# EAGLE board analog_sensor_x8 (EAGLE 7.5.0)
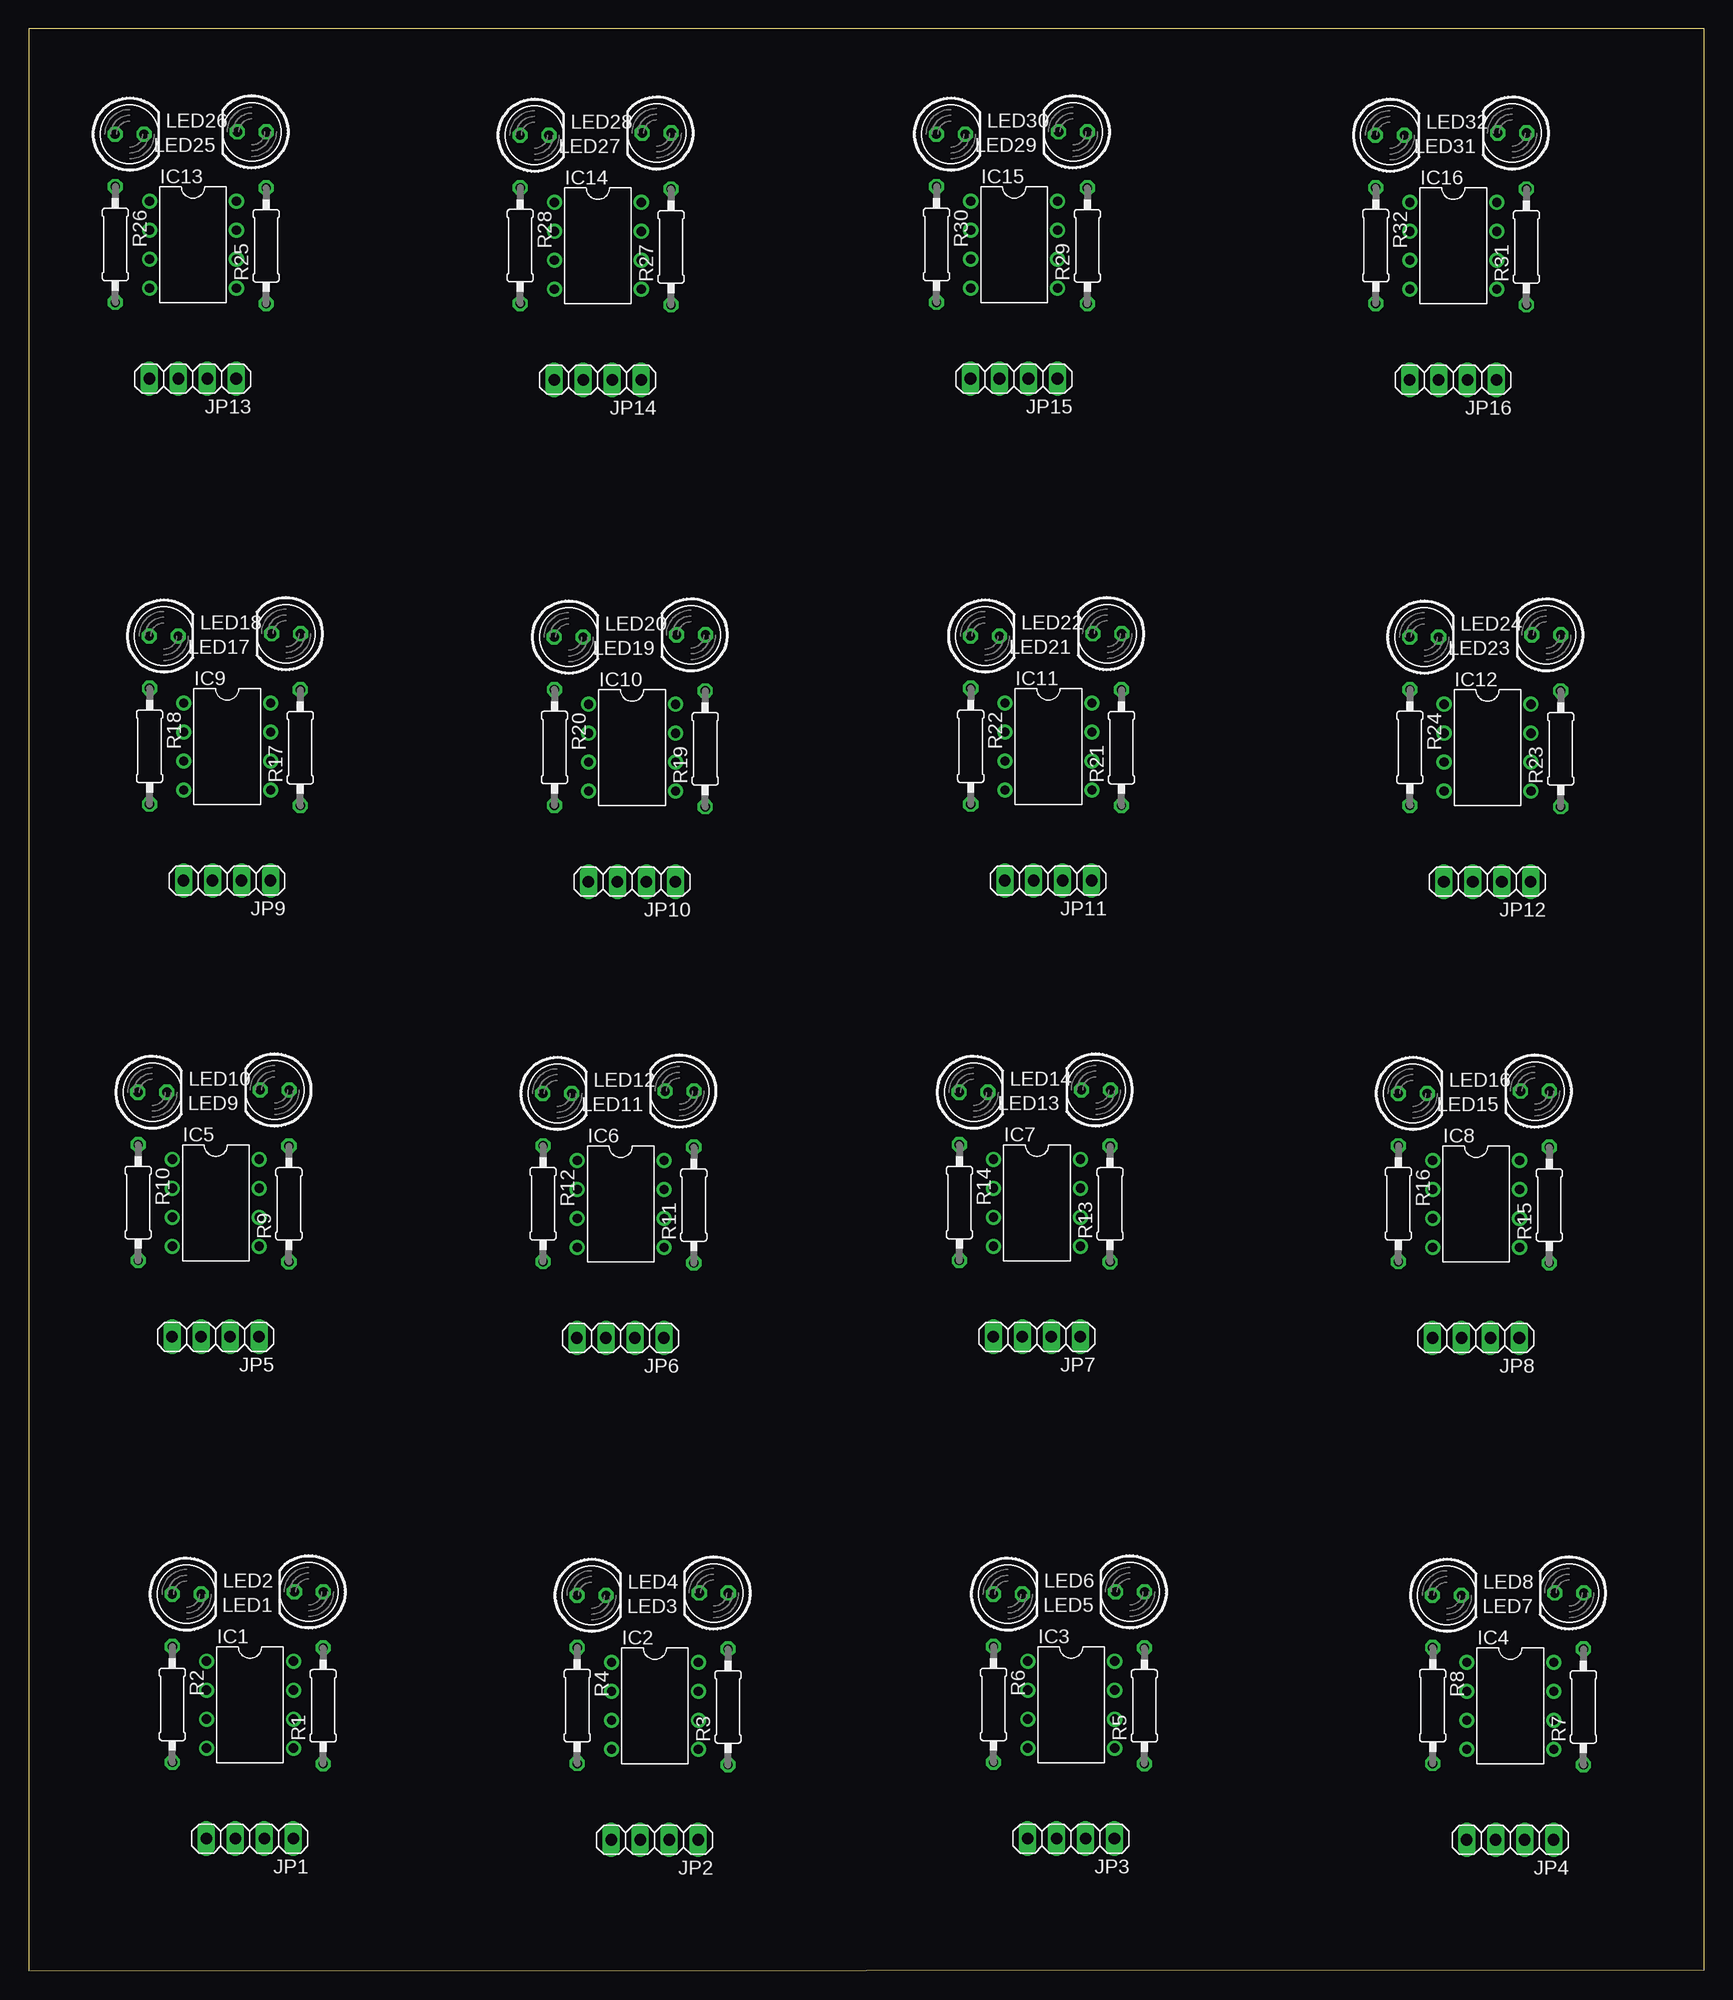
[diagram p0: board, top side]
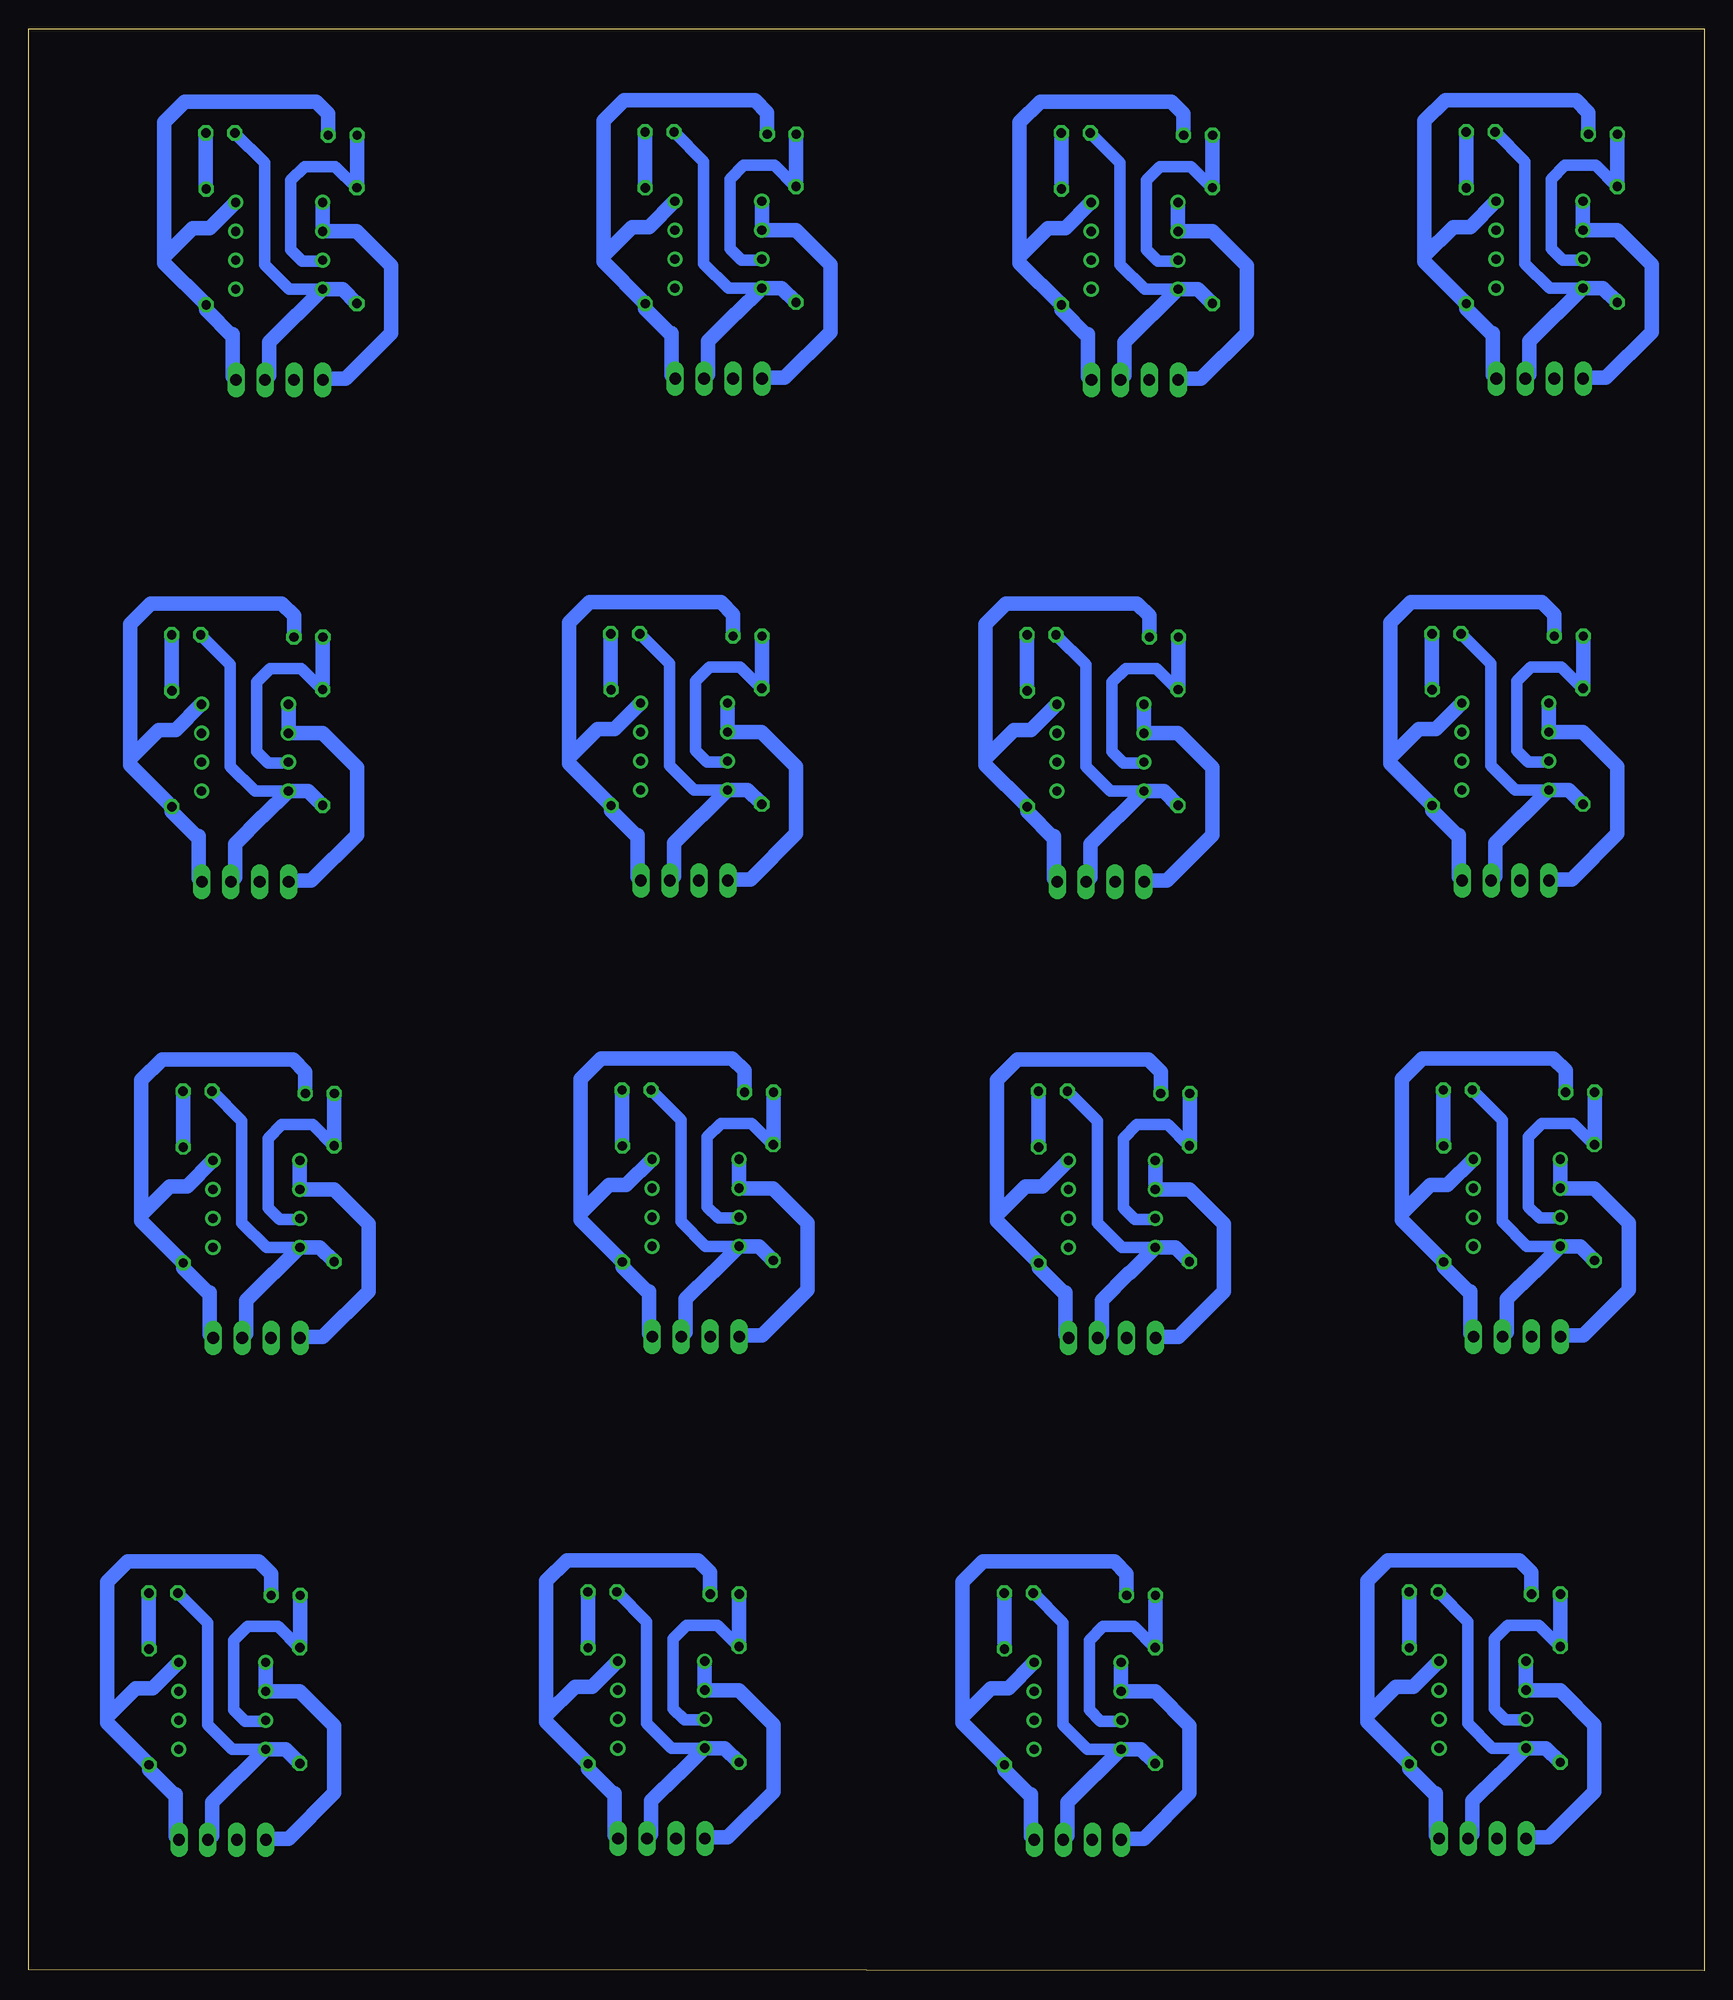
[diagram p1: board, bottom side, seen from below]

Size 146.9 x 170.3 mm. Coordinates in mm from the lower left corner, seen from the top.
Outline: 0,0 146.9,0.1 146.9,170.3 0,170.3 0,0
Copper layers (1*16): Top 0.035mm / dielectric 1.5mm / Bottom 0.035mm
Design rules "default": minimum track width 10mil, minimum drill 24mil, track to track 8mil, track to pad 8mil, pad to pad 8mil, via to via 8mil, smd to smd 8mil, copper to edge 40mil, drill to drill 8mil, minimum pad ring 10mil, minimum via ring 8mil, stop-mask expansion 4mil, vias tented up to drill 0mil, thermal gap 10mil

## Footprints (pad centres in the part's own frame; a part is rotated, then mirrored left to right if it is on the bottom)
DIL08 = drill 0.813 pad 1.27: 1 -3.81,-3.81; 2 -1.27,-3.81; 3 1.27,-3.81; 4 3.81,-3.81; 5 3.81,3.81; 6 1.27,3.81; 7 -1.27,3.81; 8 -3.81,3.81
1X04 = drill 1.016 long: 1 -3.81,0; 2 -1.27,0; 3 1.27,0; 4 3.81,0
LED5MM = drill 0.813 octagon: A -1.27,0; K 1.27,0
0207/10 = drill 0.813 octagon: 1 -5.08,0; 2 5.08,0

## Placement (x,y rotation side)
IC1  LM358N  [DIL08]  19.42,23.35 270 top
IC2  LM358N  [DIL08]  54.92,23.25 270 top
IC3  LM358N  [DIL08]  91.42,23.35 270 top
IC4  LM358N  [DIL08]  129.92,23.25 270 top
IC5  LM358N  [DIL08]  16.42,67.35 270 top
IC6  LM358N  [DIL08]  51.92,67.25 270 top
IC7  LM358N  [DIL08]  88.42,67.35 270 top
IC8  LM358N  [DIL08]  126.92,67.25 270 top
IC9  LM358N  [DIL08]  17.42,107.35 270 top
IC10  LM358N  [DIL08]  52.92,107.25 270 top
IC11  LM358N  [DIL08]  89.42,107.35 270 top
IC12  LM358N  [DIL08]  127.92,107.25 270 top
IC13  LM358N  [DIL08]  14.42,151.35 270 top
IC14  LM358N  [DIL08]  49.92,151.25 270 top
IC15  LM358N  [DIL08]  86.42,151.35 270 top
IC16  LM358N  [DIL08]  124.92,151.25 270 top
JP1  [1X04]  19.4,11.6 180 top
JP2  [1X04]  54.9,11.5 180 top
JP3  [1X04]  91.4,11.6 180 top
JP4  [1X04]  129.9,11.5 180 top
JP5  [1X04]  16.4,55.6 180 top
JP6  [1X04]  51.9,55.5 180 top
JP7  [1X04]  88.4,55.6 180 top
JP8  [1X04]  126.9,55.5 180 top
JP9  [1X04]  17.4,95.6 180 top
JP10  [1X04]  52.9,95.5 180 top
JP11  [1X04]  89.4,95.6 180 top
JP12  [1X04]  127.9,95.5 180 top
JP13  [1X04]  14.4,139.6 180 top
JP14  [1X04]  49.9,139.5 180 top
JP15  [1X04]  86.4,139.6 180 top
JP16  [1X04]  124.9,139.5 180 top
LED1  [LED5MM]  24.58,33.24 180 top
LED2  [LED5MM]  13.86,33.04 0 top
LED3  [LED5MM]  60.08,33.14 180 top
LED4  [LED5MM]  49.36,32.94 0 top
LED5  [LED5MM]  96.58,33.24 180 top
LED6  [LED5MM]  85.86,33.04 0 top
LED7  [LED5MM]  135.08,33.14 180 top
LED8  [LED5MM]  124.36,32.94 0 top
LED9  [LED5MM]  21.58,77.24 180 top
LED10  [LED5MM]  10.86,77.04 0 top
LED11  [LED5MM]  57.08,77.14 180 top
LED12  [LED5MM]  46.36,76.94 0 top
LED13  [LED5MM]  93.58,77.24 180 top
LED14  [LED5MM]  82.86,77.04 0 top
LED15  [LED5MM]  132.08,77.14 180 top
LED16  [LED5MM]  121.36,76.94 0 top
LED17  [LED5MM]  22.58,117.24 180 top
LED18  [LED5MM]  11.86,117.04 0 top
LED19  [LED5MM]  58.08,117.14 180 top
LED20  [LED5MM]  47.36,116.94 0 top
LED21  [LED5MM]  94.58,117.24 180 top
LED22  [LED5MM]  83.86,117.04 0 top
LED23  [LED5MM]  133.08,117.14 180 top
LED24  [LED5MM]  122.36,116.94 0 top
LED25  [LED5MM]  19.58,161.24 180 top
LED26  [LED5MM]  8.86,161.04 0 top
LED27  [LED5MM]  55.08,161.14 180 top
LED28  [LED5MM]  44.36,160.94 0 top
LED29  [LED5MM]  91.58,161.24 180 top
LED30  [LED5MM]  80.86,161.04 0 top
LED31  [LED5MM]  130.08,161.14 180 top
LED32  [LED5MM]  119.36,160.94 0 top
R1  [0207/10]  25.83,23.25 90 top
R2  [0207/10]  12.61,23.37 270 top
R3  [0207/10]  61.33,23.15 90 top
R4  [0207/10]  48.11,23.27 270 top
R5  [0207/10]  97.83,23.25 90 top
R6  [0207/10]  84.61,23.37 270 top
R7  [0207/10]  136.33,23.15 90 top
R8  [0207/10]  123.11,23.27 270 top
R9  [0207/10]  22.83,67.25 90 top
R10  [0207/10]  9.61,67.37 270 top
R11  [0207/10]  58.33,67.15 90 top
R12  [0207/10]  45.11,67.27 270 top
R13  [0207/10]  94.83,67.25 90 top
R14  [0207/10]  81.61,67.37 270 top
R15  [0207/10]  133.33,67.15 90 top
R16  [0207/10]  120.11,67.27 270 top
R17  [0207/10]  23.83,107.25 90 top
R18  [0207/10]  10.61,107.37 270 top
R19  [0207/10]  59.33,107.15 90 top
R20  [0207/10]  46.11,107.27 270 top
R21  [0207/10]  95.83,107.25 90 top
R22  [0207/10]  82.61,107.37 270 top
R23  [0207/10]  134.33,107.15 90 top
R24  [0207/10]  121.11,107.27 270 top
R25  [0207/10]  20.83,151.25 90 top
R26  [0207/10]  7.61,151.37 270 top
R27  [0207/10]  56.33,151.15 90 top
R28  [0207/10]  43.11,151.27 270 top
R29  [0207/10]  92.83,151.25 90 top
R30  [0207/10]  79.61,151.37 270 top
R31  [0207/10]  131.33,151.15 90 top
R32  [0207/10]  118.11,151.27 270 top

## Library data of the parts
IC1-IC16 = linear
JP1-JP16 = pinhead
LED1-LED32 = led
R1-R32 = resistor

## Nets
GND: IC1.4 JP1.2 LED1.K R2.2
GND1: IC2.4 JP2.2 LED3.K R4.2
GND2: IC3.4 JP3.2 LED5.K R6.2
GND3: IC4.4 JP4.2 LED7.K R8.2
GND4: IC5.4 JP5.2 LED9.K R10.2
GND5: IC6.4 JP6.2 LED11.K R12.2
GND6: IC7.4 JP7.2 LED13.K R14.2
GND7: IC8.4 JP8.2 LED15.K R16.2
GND8: IC9.4 JP9.2 LED17.K R18.2
GND9: IC10.4 JP10.2 LED19.K R20.2
GND10: IC11.4 JP11.2 LED21.K R22.2
GND11: IC12.4 JP12.2 LED23.K R24.2
GND12: IC13.4 JP13.2 LED25.K R26.2
GND13: IC14.4 JP14.2 LED27.K R28.2
GND14: IC15.4 JP15.2 LED29.K R30.2
GND15: IC16.4 JP16.2 LED31.K R32.2
N$1: IC1.3 LED2.A R2.1
N$2: IC2.3 LED4.A R4.1
N$3: LED1.A R1.2
N$4: LED3.A R3.2
N$5: JP1.3
N$6: JP2.3
N$7: IC3.3 LED6.A R6.1
N$8: LED5.A R5.2
N$9: JP3.3
N$10: IC4.3 LED8.A R8.1
N$11: LED7.A R7.2
N$12: JP4.3
N$13: IC5.3 LED10.A R10.1
N$14: LED9.A R9.2
N$15: JP5.3
N$16: IC6.3 LED12.A R12.1
N$17: LED11.A R11.2
N$18: JP6.3
N$19: IC7.3 LED14.A R14.1
N$20: LED13.A R13.2
N$21: JP7.3
N$22: IC8.3 LED16.A R16.1
N$23: LED15.A R15.2
N$24: JP8.3
N$25: IC9.3 LED18.A R18.1
N$26: LED17.A R17.2
N$27: JP9.3
N$28: IC10.3 LED20.A R20.1
N$29: LED19.A R19.2
N$30: JP10.3
N$31: IC11.3 LED22.A R22.1
N$32: LED21.A R21.2
N$33: JP11.3
N$34: IC12.3 LED24.A R24.1
N$35: LED23.A R23.2
N$36: JP12.3
N$37: IC13.3 LED26.A R26.1
N$38: LED25.A R25.2
N$39: JP13.3
N$40: IC14.3 LED28.A R28.1
N$41: LED27.A R27.2
N$42: JP14.3
N$43: IC15.3 LED30.A R30.1
N$44: LED29.A R29.2
N$45: JP15.3
N$46: IC16.3 LED32.A R32.1
N$47: LED31.A R31.2
N$48: JP16.3
SIGNAL: IC1.1 IC1.2 JP1.4
SIGNAL1: IC2.1 IC2.2 JP2.4
SIGNAL2: IC3.1 IC3.2 JP3.4
SIGNAL3: IC4.1 IC4.2 JP4.4
SIGNAL4: IC5.1 IC5.2 JP5.4
SIGNAL5: IC6.1 IC6.2 JP6.4
SIGNAL6: IC7.1 IC7.2 JP7.4
SIGNAL7: IC8.1 IC8.2 JP8.4
SIGNAL8: IC9.1 IC9.2 JP9.4
SIGNAL9: IC10.1 IC10.2 JP10.4
SIGNAL10: IC11.1 IC11.2 JP11.4
SIGNAL11: IC12.1 IC12.2 JP12.4
SIGNAL12: IC13.1 IC13.2 JP13.4
SIGNAL13: IC14.1 IC14.2 JP14.4
SIGNAL14: IC15.1 IC15.2 JP15.4
SIGNAL15: IC16.1 IC16.2 JP16.4
VCC: IC1.8 JP1.1 LED2.K R1.1
VCC1: IC2.8 JP2.1 LED4.K R3.1
VCC2: IC3.8 JP3.1 LED6.K R5.1
VCC3: IC4.8 JP4.1 LED8.K R7.1
VCC4: IC5.8 JP5.1 LED10.K R9.1
VCC5: IC6.8 JP6.1 LED12.K R11.1
VCC6: IC7.8 JP7.1 LED14.K R13.1
VCC7: IC8.8 JP8.1 LED16.K R15.1
VCC8: IC9.8 JP9.1 LED18.K R17.1
VCC9: IC10.8 JP10.1 LED20.K R19.1
VCC10: IC11.8 JP11.1 LED22.K R21.1
VCC11: IC12.8 JP12.1 LED24.K R23.1
VCC12: IC13.8 JP13.1 LED26.K R25.1
VCC13: IC14.8 JP14.1 LED28.K R27.1
VCC14: IC15.8 JP15.1 LED30.K R29.1
VCC15: IC16.8 JP16.1 LED32.K R31.1

## Tracks (layer width: path | path; a pad name or v marks a point on that pad's centre or on a via)
GND
  Bottom 1.016: IC1.4 18.54,19.54 20.7,21.7 20.7,30.63 LED1.K
  Bottom 1.27: R2.2 13.86,19.54 IC1.4 17.85,17.3 17.9,17.3 20.3,14.9 20.3,11.97 JP1.2
GND1
  Bottom 1.016: IC2.4 54.04,19.44 56.2,21.6 56.2,30.53 LED3.K
  Bottom 1.27: R4.2 49.36,19.44 IC2.4 53.35,17.2 53.4,17.2 55.8,14.8 55.8,11.87 JP2.2
GND2
  Bottom 1.016: IC3.4 90.54,19.54 92.7,21.7 92.7,30.63 LED5.K
  Bottom 1.27: R6.2 85.86,19.54 IC3.4 89.85,17.3 89.9,17.3 92.3,14.9 92.3,11.97 JP3.2
GND3
  Bottom 1.016: IC4.4 129.04,19.44 131.2,21.6 131.2,30.53 LED7.K
  Bottom 1.27: R8.2 124.36,19.44 IC4.4 128.35,17.2 128.4,17.2 130.8,14.8 130.8,11.87 JP4.2
GND4
  Bottom 1.016: IC5.4 15.54,63.54 17.7,65.7 17.7,74.63 LED9.K
  Bottom 1.27: R10.2 10.86,63.54 IC5.4 14.85,61.3 14.9,61.3 17.3,58.9 17.3,55.97 JP5.2
GND5
  Bottom 1.016: IC6.4 51.04,63.44 53.2,65.6 53.2,74.53 LED11.K
  Bottom 1.27: R12.2 46.36,63.44 IC6.4 50.35,61.2 50.4,61.2 52.8,58.8 52.8,55.87 JP6.2
GND6
  Bottom 1.016: IC7.4 87.54,63.54 89.7,65.7 89.7,74.63 LED13.K
  Bottom 1.27: R14.2 82.86,63.54 IC7.4 86.85,61.3 86.9,61.3 89.3,58.9 89.3,55.97 JP7.2
GND7
  Bottom 1.016: IC8.4 126.04,63.44 128.2,65.6 128.2,74.53 LED15.K
  Bottom 1.27: R16.2 121.36,63.44 IC8.4 125.35,61.2 125.4,61.2 127.8,58.8 127.8,55.87 JP8.2
GND8
  Bottom 1.016: IC9.4 16.54,103.54 18.7,105.7 18.7,114.63 LED17.K
  Bottom 1.27: R18.2 11.86,103.54 IC9.4 15.85,101.3 15.9,101.3 18.3,98.9 18.3,95.97 JP9.2
GND9
  Bottom 1.016: IC10.4 52.04,103.44 54.2,105.6 54.2,114.53 LED19.K
  Bottom 1.27: R20.2 47.36,103.44 IC10.4 51.35,101.2 51.4,101.2 53.8,98.8 53.8,95.87 JP10.2
GND10
  Bottom 1.016: IC11.4 88.54,103.54 90.7,105.7 90.7,114.63 LED21.K
  Bottom 1.27: R22.2 83.86,103.54 IC11.4 87.85,101.3 87.9,101.3 90.3,98.9 90.3,95.97 JP11.2
GND11
  Bottom 1.016: IC12.4 127.04,103.44 129.2,105.6 129.2,114.53 LED23.K
  Bottom 1.27: R24.2 122.36,103.44 IC12.4 126.35,101.2 126.4,101.2 128.8,98.8 128.8,95.87 JP12.2
GND12
  Bottom 1.016: IC13.4 13.54,147.54 15.7,149.7 15.7,158.63 LED25.K
  Bottom 1.27: R26.2 8.86,147.54 IC13.4 12.85,145.3 12.9,145.3 15.3,142.9 15.3,139.97 JP13.2
GND13
  Bottom 1.016: IC14.4 49.04,147.44 51.2,149.6 51.2,158.53 LED27.K
  Bottom 1.27: R28.2 44.36,147.44 IC14.4 48.35,145.2 48.4,145.2 50.8,142.8 50.8,139.87 JP14.2
GND14
  Bottom 1.016: IC15.4 85.54,147.54 87.7,149.7 87.7,158.63 LED29.K
  Bottom 1.27: R30.2 80.86,147.54 IC15.4 84.85,145.3 84.9,145.3 87.3,142.9 87.3,139.97 JP15.2
GND15
  Bottom 1.016: IC16.4 124.04,147.44 126.2,149.6 126.2,158.53 LED31.K
  Bottom 1.27: R32.2 119.36,147.44 IC16.4 123.35,145.2 123.4,145.2 125.8,142.8 125.8,139.87 JP16.2
N$1
  Bottom 1.016: R2.1 12.65,28.45 14.5,30.3 17.2,30.3 18.4,29.1 18.4,23 17.4,22 15.69,22 IC1.3
  Bottom 1.27: LED2.A 12.59,28.47 R2.1
N$2
  Bottom 1.016: R4.1 48.15,28.35 50,30.2 52.7,30.2 53.9,29 53.9,22.9 52.9,21.9 51.19,21.9 IC2.3
  Bottom 1.27: LED4.A 48.09,28.37 R4.1
N$3
  Bottom 1.27: LED1.A 25.85,28.35 R1.2
N$4
  Bottom 1.27: LED3.A 61.35,28.25 R3.2
N$7
  Bottom 1.016: R6.1 84.65,28.45 86.5,30.3 89.2,30.3 90.4,29.1 90.4,23 89.4,22 87.69,22 IC3.3
  Bottom 1.27: LED6.A 84.59,28.47 R6.1
N$8
  Bottom 1.27: LED5.A 97.85,28.35 R5.2
N$10
  Bottom 1.016: R8.1 123.15,28.35 125,30.2 127.7,30.2 128.9,29 128.9,22.9 127.9,21.9 126.19,21.9 IC4.3
  Bottom 1.27: LED8.A 123.09,28.37 R8.1
N$11
  Bottom 1.27: LED7.A 136.35,28.25 R7.2
N$13
  Bottom 1.016: R10.1 9.65,72.45 11.5,74.3 14.2,74.3 15.4,73.1 15.4,67 14.4,66 12.69,66 IC5.3
  Bottom 1.27: LED10.A 9.59,72.47 R10.1
N$14
  Bottom 1.27: LED9.A 22.85,72.35 R9.2
N$16
  Bottom 1.016: R12.1 45.15,72.35 47,74.2 49.7,74.2 50.9,73 50.9,66.9 49.9,65.9 48.19,65.9 IC6.3
  Bottom 1.27: LED12.A 45.09,72.37 R12.1
N$17
  Bottom 1.27: LED11.A 58.35,72.25 R11.2
N$19
  Bottom 1.016: R14.1 81.65,72.45 83.5,74.3 86.2,74.3 87.4,73.1 87.4,67 86.4,66 84.69,66 IC7.3
  Bottom 1.27: LED14.A 81.59,72.47 R14.1
N$20
  Bottom 1.27: LED13.A 94.85,72.35 R13.2
N$22
  Bottom 1.016: R16.1 120.15,72.35 122,74.2 124.7,74.2 125.9,73 125.9,66.9 124.9,65.9 123.19,65.9 IC8.3
  Bottom 1.27: LED16.A 120.09,72.37 R16.1
N$23
  Bottom 1.27: LED15.A 133.35,72.25 R15.2
N$25
  Bottom 1.016: R18.1 10.65,112.45 12.5,114.3 15.2,114.3 16.4,113.1 16.4,107 15.4,106 13.69,106 IC9.3
  Bottom 1.27: LED18.A 10.59,112.47 R18.1
N$26
  Bottom 1.27: LED17.A 23.85,112.35 R17.2
N$28
  Bottom 1.016: R20.1 46.15,112.35 48,114.2 50.7,114.2 51.9,113 51.9,106.9 50.9,105.9 49.19,105.9 IC10.3
  Bottom 1.27: LED20.A 46.09,112.37 R20.1
N$29
  Bottom 1.27: LED19.A 59.35,112.25 R19.2
N$31
  Bottom 1.016: R22.1 82.65,112.45 84.5,114.3 87.2,114.3 88.4,113.1 88.4,107 87.4,106 85.69,106 IC11.3
  Bottom 1.27: LED22.A 82.59,112.47 R22.1
N$32
  Bottom 1.27: LED21.A 95.85,112.35 R21.2
N$34
  Bottom 1.016: R24.1 121.15,112.35 123,114.2 125.7,114.2 126.9,113 126.9,106.9 125.9,105.9 124.19,105.9 IC12.3
  Bottom 1.27: LED24.A 121.09,112.37 R24.1
N$35
  Bottom 1.27: LED23.A 134.35,112.25 R23.2
N$37
  Bottom 1.016: R26.1 7.65,156.45 9.5,158.3 12.2,158.3 13.4,157.1 13.4,151 12.4,150 10.69,150 IC13.3
  Bottom 1.27: LED26.A 7.59,156.47 R26.1
N$38
  Bottom 1.27: LED25.A 20.85,156.35 R25.2
N$40
  Bottom 1.016: R28.1 43.15,156.35 45,158.2 47.7,158.2 48.9,157 48.9,150.9 47.9,149.9 46.19,149.9 IC14.3
  Bottom 1.27: LED28.A 43.09,156.37 R28.1
N$41
  Bottom 1.27: LED27.A 56.35,156.25 R27.2
N$43
  Bottom 1.016: R30.1 79.65,156.45 81.5,158.3 84.2,158.3 85.4,157.1 85.4,151 84.4,150 82.69,150 IC15.3
  Bottom 1.27: LED30.A 79.59,156.47 R30.1
N$44
  Bottom 1.27: LED29.A 92.85,156.35 R29.2
N$46
  Bottom 1.016: R32.1 118.15,156.35 120,158.2 122.7,158.2 123.9,157 123.9,150.9 122.9,149.9 121.19,149.9 IC16.3
  Bottom 1.27: LED32.A 118.09,156.37 R32.1
N$47
  Bottom 1.27: LED31.A 131.35,156.25 R31.2
SIGNAL
  Bottom 1.27: IC1.1 IC1.2 12.62,24.62 9.6,21.6 9.6,15.7 13.6,11.7 15.49,11.7 JP1.4
SIGNAL1
  Bottom 1.27: IC2.1 IC2.2 48.12,24.52 45.1,21.5 45.1,15.6 49.1,11.6 50.99,11.6 JP2.4
SIGNAL2
  Bottom 1.27: IC3.1 IC3.2 84.62,24.62 81.6,21.6 81.6,15.7 85.6,11.7 87.49,11.7 JP3.4
SIGNAL3
  Bottom 1.27: IC4.1 IC4.2 123.12,24.52 120.1,21.5 120.1,15.6 124.1,11.6 125.99,11.6 JP4.4
SIGNAL4
  Bottom 1.27: IC5.1 IC5.2 9.62,68.62 6.6,65.6 6.6,59.7 10.6,55.7 12.49,55.7 JP5.4
SIGNAL5
  Bottom 1.27: IC6.1 IC6.2 45.12,68.52 42.1,65.5 42.1,59.6 46.1,55.6 47.99,55.6 JP6.4
SIGNAL6
  Bottom 1.27: IC7.1 IC7.2 81.62,68.62 78.6,65.6 78.6,59.7 82.6,55.7 84.49,55.7 JP7.4
SIGNAL7
  Bottom 1.27: IC8.1 IC8.2 120.12,68.52 117.1,65.5 117.1,59.6 121.1,55.6 122.99,55.6 JP8.4
SIGNAL8
  Bottom 1.27: IC9.1 IC9.2 10.62,108.62 7.6,105.6 7.6,99.7 11.6,95.7 13.49,95.7 JP9.4
SIGNAL9
  Bottom 1.27: IC10.1 IC10.2 46.12,108.52 43.1,105.5 43.1,99.6 47.1,95.6 48.99,95.6 JP10.4
SIGNAL10
  Bottom 1.27: IC11.1 IC11.2 82.62,108.62 79.6,105.6 79.6,99.7 83.6,95.7 85.49,95.7 JP11.4
SIGNAL11
  Bottom 1.27: IC12.1 IC12.2 121.12,108.52 118.1,105.5 118.1,99.6 122.1,95.6 123.99,95.6 JP12.4
SIGNAL12
  Bottom 1.27: IC13.1 IC13.2 7.62,152.62 4.6,149.6 4.6,143.7 8.6,139.7 10.49,139.7 JP13.4
SIGNAL13
  Bottom 1.27: IC14.1 IC14.2 43.12,152.52 40.1,149.5 40.1,143.6 44.1,139.6 45.99,139.6 JP14.4
SIGNAL14
  Bottom 1.27: IC15.1 IC15.2 79.62,152.62 76.6,149.6 76.6,143.7 80.6,139.7 82.49,139.7 JP15.4
SIGNAL15
  Bottom 1.27: IC16.1 IC16.2 118.12,152.52 115.1,149.5 115.1,143.6 119.1,139.6 120.99,139.6 JP16.4
VCC
  Bottom 1.27: IC1.8 25.5,24.9 27,24.9 29.5,22.4 | LED2.K 15.13,34.93 16.2,36 27.7,36 29.5,34.2 29.5,22.4 | 29.5,22.4 29.5,21.84 R1.1 25.83,17.73 23.5,15.4 | 23.5,15.59 23.5,15.4 | 23.5,15.4 23.5,11.89 JP1.1
VCC1
  Bottom 1.27: IC2.8 61,24.8 62.5,24.8 65,22.3 | LED4.K 50.63,34.83 51.7,35.9 63.2,35.9 65,34.1 65,22.3 | 65,22.3 65,21.74 R3.1 61.33,17.63 59,15.3 | 59,15.49 59,15.3 | 59,15.3 59,11.79 JP2.1
VCC2
  Bottom 1.27: IC3.8 97.5,24.9 99,24.9 101.5,22.4 | LED6.K 87.13,34.93 88.2,36 99.7,36 101.5,34.2 101.5,22.4 | 101.5,22.4 101.5,21.84 R5.1 97.83,17.73 95.5,15.4 | 95.5,15.59 95.5,15.4 | 95.5,15.4 95.5,11.89 JP3.1
VCC3
  Bottom 1.27: IC4.8 136,24.8 137.5,24.8 140,22.3 | LED8.K 125.63,34.83 126.7,35.9 138.2,35.9 140,34.1 140,22.3 | 140,22.3 140,21.74 R7.1 136.33,17.63 134,15.3 | 134,15.49 134,15.3 | 134,15.3 134,11.79 JP4.1
VCC4
  Bottom 1.27: IC5.8 22.5,68.9 24,68.9 26.5,66.4 | LED10.K 12.13,78.93 13.2,80 24.7,80 26.5,78.2 26.5,66.4 | 26.5,66.4 26.5,65.84 R9.1 22.83,61.73 20.5,59.4 | 20.5,59.59 20.5,59.4 | 20.5,59.4 20.5,55.89 JP5.1
VCC5
  Bottom 1.27: IC6.8 58,68.8 59.5,68.8 62,66.3 | LED12.K 47.63,78.83 48.7,79.9 60.2,79.9 62,78.1 62,66.3 | 62,66.3 62,65.74 R11.1 58.33,61.63 56,59.3 | 56,59.49 56,59.3 | 56,59.3 56,55.79 JP6.1
VCC6
  Bottom 1.27: IC7.8 94.5,68.9 96,68.9 98.5,66.4 | LED14.K 84.13,78.93 85.2,80 96.7,80 98.5,78.2 98.5,66.4 | 98.5,66.4 98.5,65.84 R13.1 94.83,61.73 92.5,59.4 | 92.5,59.59 92.5,59.4 | 92.5,59.4 92.5,55.89 JP7.1
VCC7
  Bottom 1.27: IC8.8 133,68.8 134.5,68.8 137,66.3 | LED16.K 122.63,78.83 123.7,79.9 135.2,79.9 137,78.1 137,66.3 | 137,66.3 137,65.74 R15.1 133.33,61.63 131,59.3 | 131,59.49 131,59.3 | 131,59.3 131,55.79 JP8.1
VCC8
  Bottom 1.27: IC9.8 23.5,108.9 25,108.9 27.5,106.4 | LED18.K 13.13,118.93 14.2,120 25.7,120 27.5,118.2 27.5,106.4 | 27.5,106.4 27.5,105.84 R17.1 23.83,101.73 21.5,99.4 | 21.5,99.59 21.5,99.4 | 21.5,99.4 21.5,95.89 JP9.1
VCC9
  Bottom 1.27: IC10.8 59,108.8 60.5,108.8 63,106.3 | LED20.K 48.63,118.83 49.7,119.9 61.2,119.9 63,118.1 63,106.3 | 63,106.3 63,105.74 R19.1 59.33,101.63 57,99.3 | 57,99.49 57,99.3 | 57,99.3 57,95.79 JP10.1
VCC10
  Bottom 1.27: IC11.8 95.5,108.9 97,108.9 99.5,106.4 | LED22.K 85.13,118.93 86.2,120 97.7,120 99.5,118.2 99.5,106.4 | 99.5,106.4 99.5,105.84 R21.1 95.83,101.73 93.5,99.4 | 93.5,99.59 93.5,99.4 | 93.5,99.4 93.5,95.89 JP11.1
VCC11
  Bottom 1.27: IC12.8 134,108.8 135.5,108.8 138,106.3 | LED24.K 123.63,118.83 124.7,119.9 136.2,119.9 138,118.1 138,106.3 | 138,106.3 138,105.74 R23.1 134.33,101.63 132,99.3 | 132,99.49 132,99.3 | 132,99.3 132,95.79 JP12.1
VCC12
  Bottom 1.27: IC13.8 20.5,152.9 22,152.9 24.5,150.4 | LED26.K 10.13,162.93 11.2,164 22.7,164 24.5,162.2 24.5,150.4 | 24.5,150.4 24.5,149.84 R25.1 20.83,145.73 18.5,143.4 | 18.5,143.59 18.5,143.4 | 18.5,143.4 18.5,139.89 JP13.1
VCC13
  Bottom 1.27: IC14.8 56,152.8 57.5,152.8 60,150.3 | LED28.K 45.63,162.83 46.7,163.9 58.2,163.9 60,162.1 60,150.3 | 60,150.3 60,149.74 R27.1 56.33,145.63 54,143.3 | 54,143.49 54,143.3 | 54,143.3 54,139.79 JP14.1
VCC14
  Bottom 1.27: IC15.8 92.5,152.9 94,152.9 96.5,150.4 | LED30.K 82.13,162.93 83.2,164 94.7,164 96.5,162.2 96.5,150.4 | 96.5,150.4 96.5,149.84 R29.1 92.83,145.73 90.5,143.4 | 90.5,143.59 90.5,143.4 | 90.5,143.4 90.5,139.89 JP15.1
VCC15
  Bottom 1.27: IC16.8 131,152.8 132.5,152.8 135,150.3 | LED32.K 120.63,162.83 121.7,163.9 133.2,163.9 135,162.1 135,150.3 | 135,150.3 135,149.74 R31.1 131.33,145.63 129,143.3 | 129,143.49 129,143.3 | 129,143.3 129,139.79 JP16.1